# Altium PCB SENSOR.PcbDoc
Units mil, origin at the board's own origin, x right, y up, seen from the top; angles counter-clockwise.
Board outline 2510 x 1960 mil, 2 copper layers (Top Layer, Bottom Layer); 45 components, 28 nets, 139 pads, 57 vias.
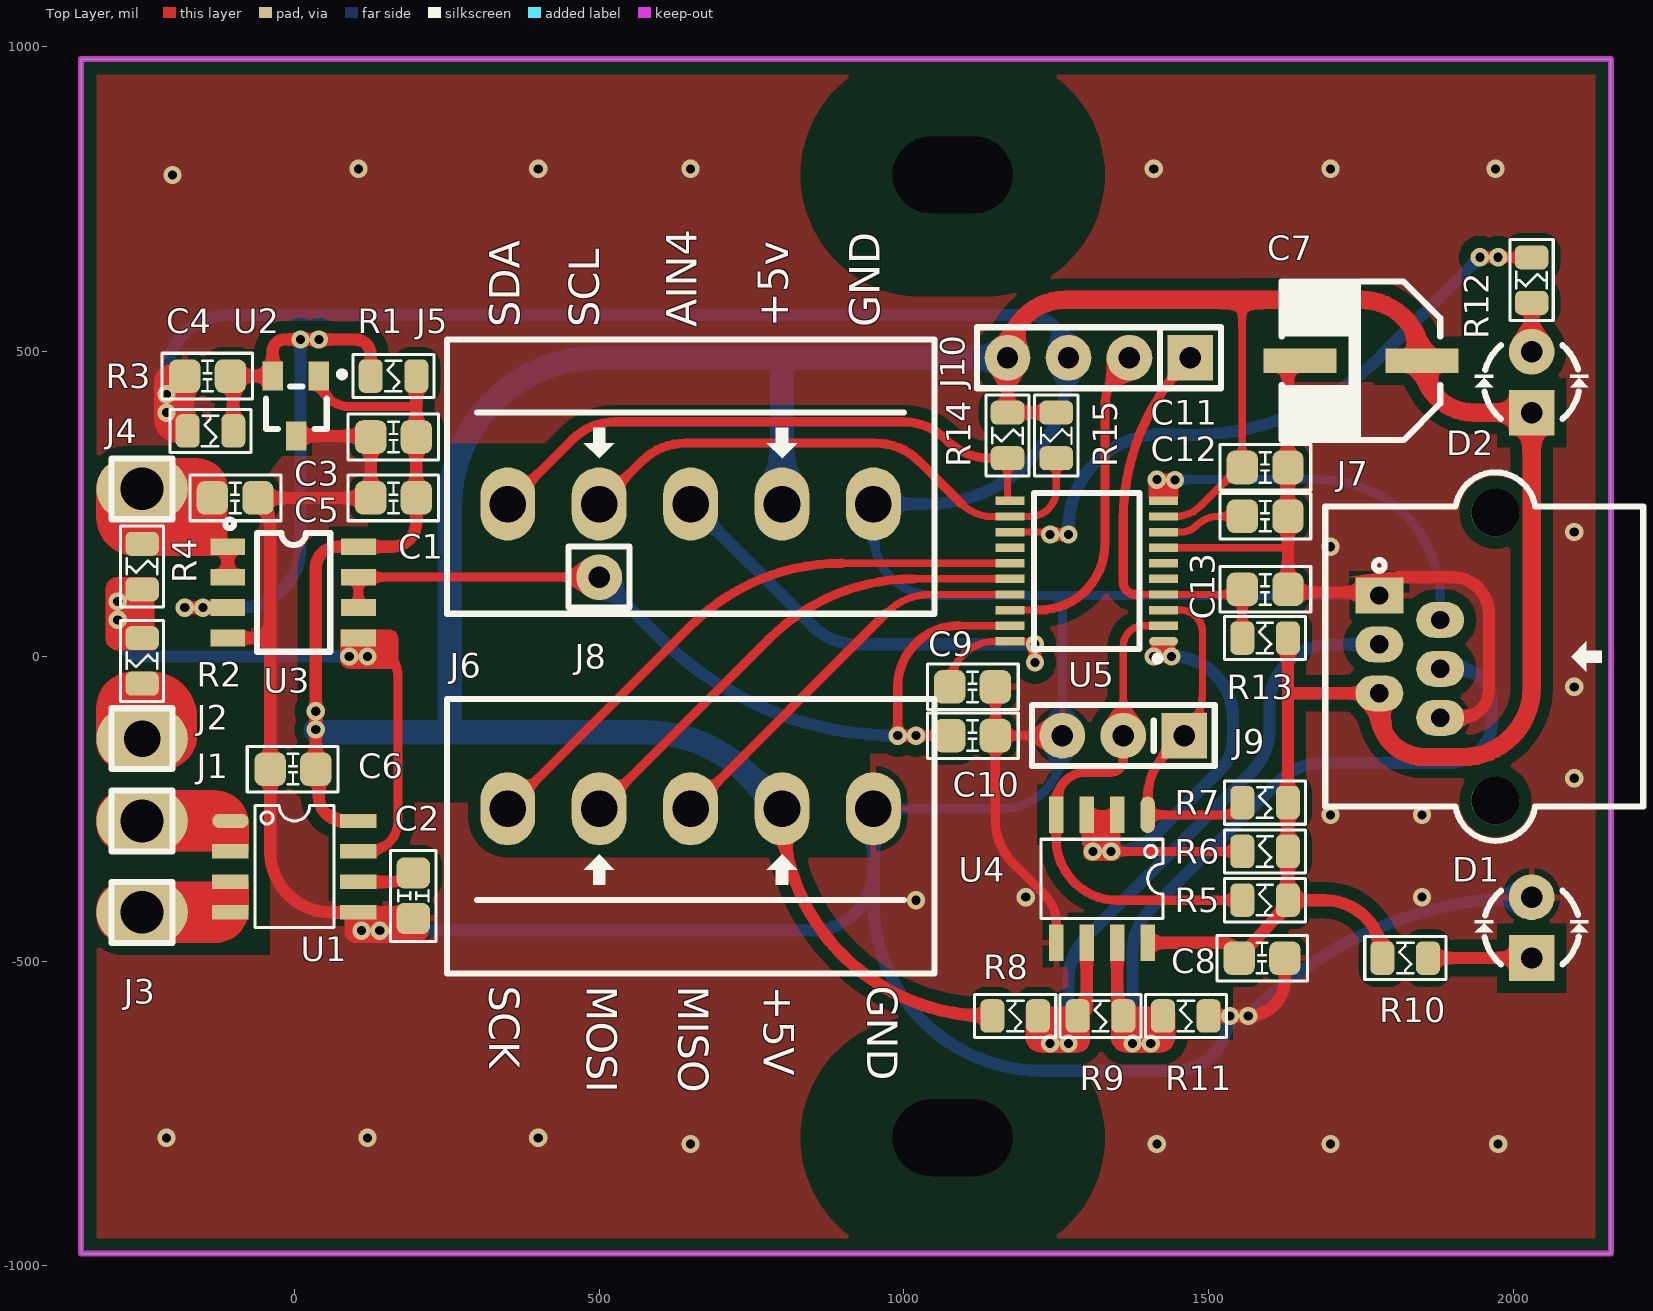
[diagram p0: Top Layer view]
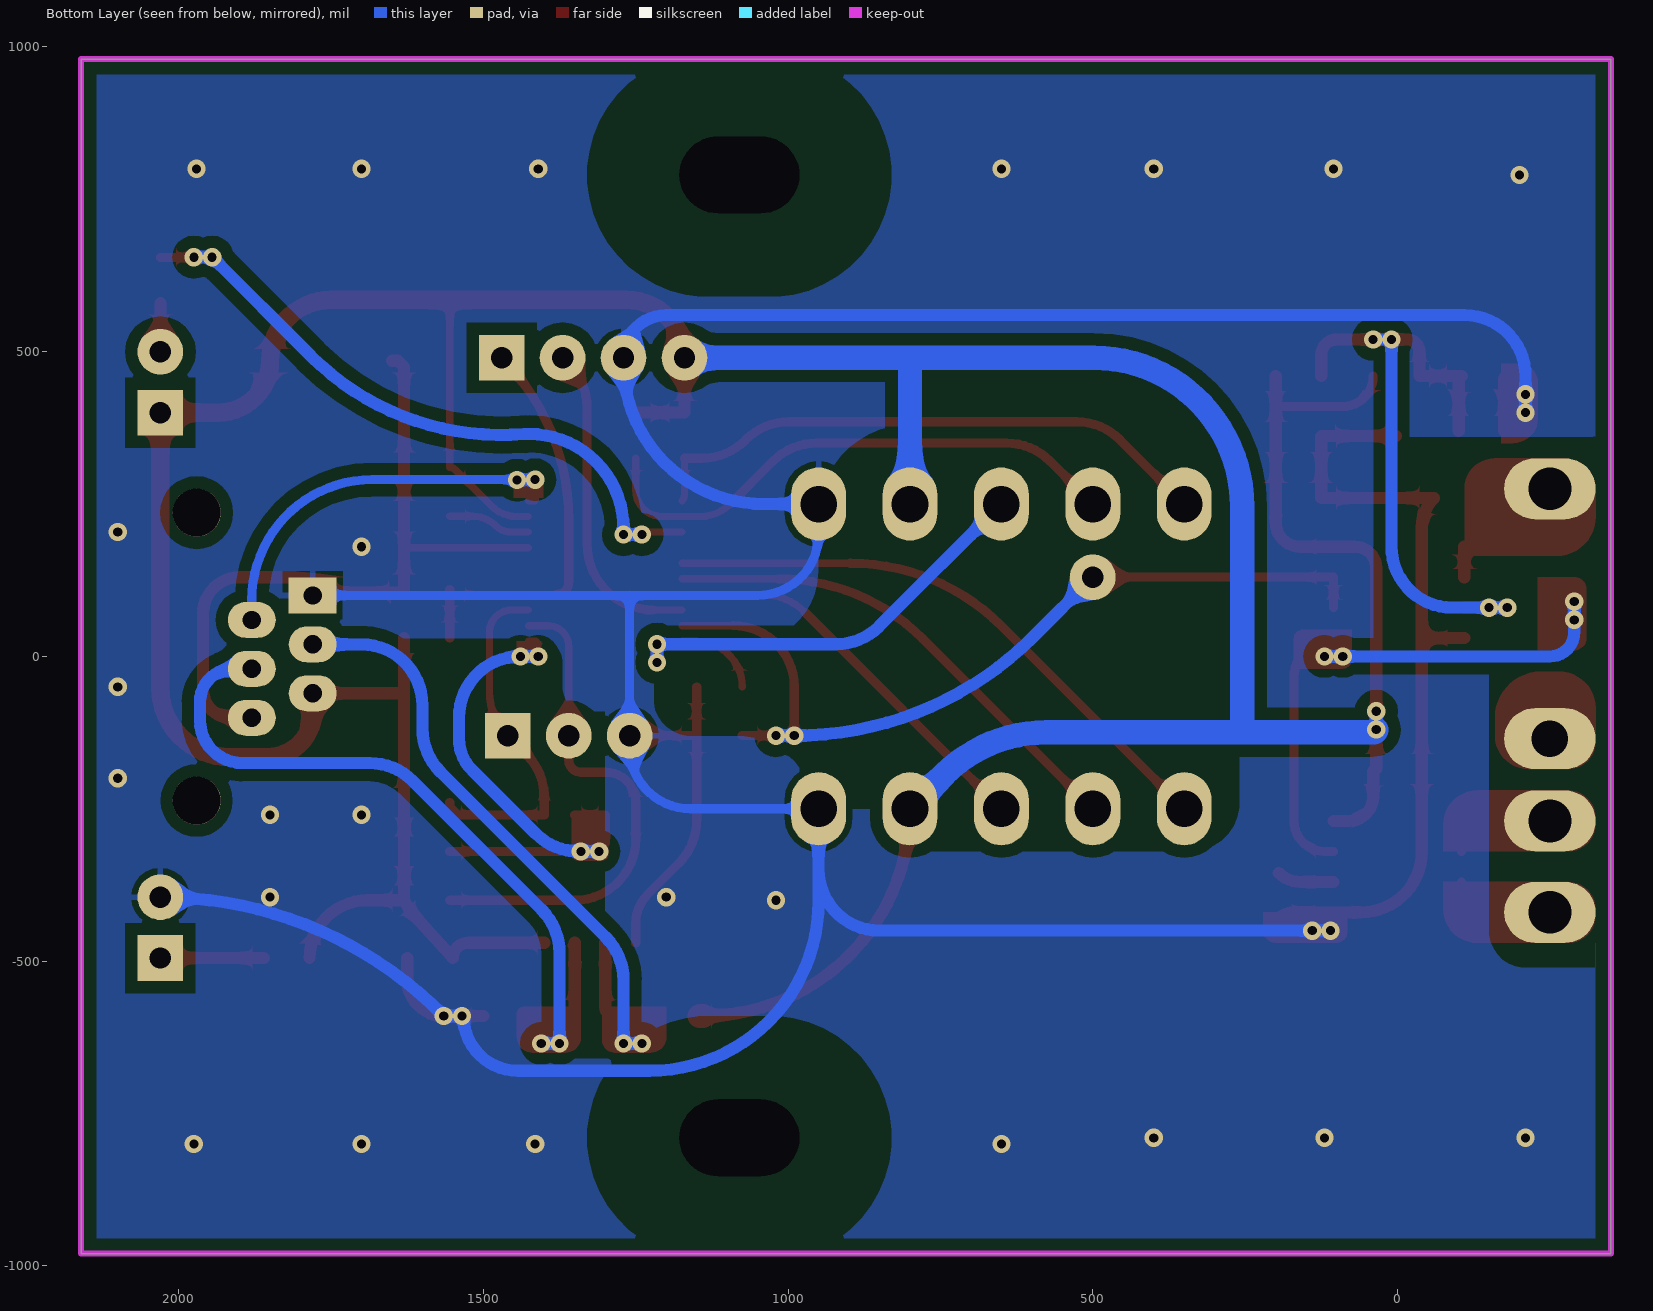
[diagram p1: Bottom Layer view, seen from below]

## Layer stack, top to bottom
Top Solder: solder mask 0.4, Solder Resist, Dk 3.5
Top Layer: signal copper 1.4
Dielectric 1: dielectric 12.6, FR-4, Dk 4.8
Bottom Layer: signal copper 1.4
Bottom Solder: solder mask 0.4, Solder Resist, Dk 3.5

## Board outline
-350,-980 2160,-980 2160,980 -350,980

## Design rules (kind name [scope] priority, off if disabled: settings)
Clearance [All] p1: gap=20 ignorepadtopadclearanceinfootprint=TRUE
PlaneConnect [All] p1: pad.planeconnectstyle=Relief pad.reliefexpansion=20 pad.reliefentries=4 pad.reliefconductorwidth=10 pad.reliefairgap=10 via.planeconnectstyle=Direct via.reliefexpansion=20 via.reliefentries=4 via.reliefconductorwidth=10 via.reliefairgap=10
PolygonConnect [All] p1: thpad.connectstyle=Relief thpad.reliefconductorwidth=10 thpad.reliefentries=4 thpad.polygonreliefangle="90 Angle" thpad.airgapwidth=10 smdpad.connectstyle=Relief smdpad.reliefconductorwidth=10 smdpad.reliefentries=4 smdpad.polygonreliefangle="90 Angle" smdpad.airgapwidth=10 via.connectstyle=Direct via.reliefconductorwidth=10 via.reliefentries=4 via.polygonreliefangle="90 Angle" via.airgapwidth=10
RoutingVias [All] p1: holewidth=15 width=30 viastyle="Through Hole" minholewidth=12 minwidth=24 maxholewidth=28 maxwidth=50
SolderMaskExpansion [All] p1: expansion=4
Width [All] p1: maxlimit=50 minlimit=10 preferedwidth=20
29 further rules are at their usual default settings.

## Classes and differential pairs
component class SENSOR: C8 C9 C10 C11 C12 C13 D1 D2 J7 J8 J9 J10 R6 R8 R10 R11 R12 R13 R14 R15 U3 U4 U5

## Components (designator, comment, footprint, x,y, rotation, side; value= is the part's Value field where it differs from the comment)
C1 "104" CAP-0805 125.2,260 r0 top value=103
C2 "1nF" CAP-0805 195,-430 r90 top value=103
C3 "0.1uF" CAP-0805 125.2,360 r0 top value=103
C4 "1uF" CAP-0805 -180,460 r0 top value=103
C5 "1uF" CAP-0805 -60,260 r180 top value=103
C6 "104" CAP-0805 -39.8,-185 r0 top value=103
C7 "100uF/16V" CAP_AL_6.3x5.5 1750,485 r0 top
C8 "104" CAP-0805 1625,-495 r180 top value=103
C9 "104" CAP-0805 1150,-50 r180 top value=103
C10 "104" CAP-0805 1150,-130 r180 top value=103
C11 "104" CAP-0805 1630,310 r180 top value=103
C12 "104" CAP-0805 1630,230 r180 top value=103
C13 "104" CAP-0805 1630,110 r180 top value=103
D1 "LED-RED" LED-3-R 2030,-445 r90 top
D2 "LED-GRE" LED-3-G 2030,450 r90 top
J1 "Jump_1" JUMP_1#1 -250,-270 r0 top
J2 "Jump_1" JUMP_1#2 -250,-135 r0 top
J3 "Jump_1" JUMP_1#1 -250,-420 r0 top
J4 "Jump_1" JUMP_1#1 -250,275 r0 top
J5 "I2C" "CON2 15EDG3.81-5P" 650,250 r180 top
J6 "SPI" "CON2 15EDG3.81-5P" 650,-250 r0 top
J7 "RJ11-6P6C" RJ12-6P6C 1780,-0.35 r270 top
J8 "Jump_1" JUMP_1#3 500,130 r0 top
J9 "UART" JUMP_3 1460,-130 r270 top
J10 "PRG" Jump_4 1470,490 r270 top
R1 "10K" RES-0805 125.2,460 r0 top value=1K
R2 "20K" RES-0805 -250,30 r270 top value=1K
R3 "10K" RES-0805 -175.2,370 r0 top value=1K
R4 "10K" RES-0805 -250,184.8 r270 top value=1K
R5 "10K" RES-0805 1555.2,-400 r0 top value=1K
R6 "10K" RES-0805 1555.2,-320 r0 top value=1K
R7 "10K" RES-0805 1555.2,-240 r0 top value=1K
R8 "10K" RES-0805 1220,-590 r180 top value=1K
R9 "NC/120R" RES-0805 1360,-590 r180 top value=1K
R10 "10K" RES-0805 1860,-495 r180 top value=1K
R11 "10K" RES-0805 1500,-590 r180 top value=1K
R12 "10K" RES-0805 2030,654.8 r270 top value=1K
R13 "10K" RES-0805 1555.2,30 r0 top value=1K
R14 "10K" RES-0805 1170,325.2 r90 top value=1K
R15 "10K" RES-0805 1250,325.2 r90 top value=1K
U1 "ACS712" SOP08 -105,-270 r0 top
U2 "MCP1525" "SOT_23 - 132" 3,362.81 r180 top
U3 "LM358" SOIC-8 -111.18,182.56 r0 top
U4 "MAX485" SOP08 1400,-260 r270 top
U5 "STM8S003F3P6" TSSOP20 1300,140 r180 top

## Footprints (in the part's own frame and the unit in brackets; to place one, negate y for a bottom-side part, rotate by r counter-clockwise, add the part's x,y. Pads: shape width x height; smd on the part's side, far side on the other; paste and mask are expansions set on the pad)
CAP-0805 [mm] "Chip Cap; Body 2 x 1.2 mm (LxW typ)"
  rrect50% 1.3x1.4 smd: 1(0,0) 2(1.9,0)
  silkscreen extent -0.95,-0.95 2.83,0.95, body extent -0.05,-0.62 1.95,0.62, height 0.8
CAP_AL_6.3x5.5 [mil]
  rect 120x40 smd: 1(100,0) 2(-100,0)
  silkscreen extent -130,-130 130,130, body extent -144,-130 144,130, height 237
"CON2 15EDG3.81-5P" [mil] "CON2 15EDG3.81-5P"
  oval 90x120 hole 60: 1(-300,0) 2(-150,0) 3(0,0) 4(150,0) 5(300,0)
  silkscreen extent -400,-270 400,180, body extent -391,-264 391,170, height 722
JUMP_1#1 [mil] "Jump_1"
  oval 150x100 hole 70: 1(0,0)
  silkscreen extent -50,-50 50,50, body extent -53,-53 53,53, height 346
JUMP_1#2 [mil] "Jump_1"
  oval 150x100 hole 60: 1(0,0)
  silkscreen extent -50,-50 50,50, body extent -53,-53 53,53, height 346
JUMP_1#3 [mil] "Jump_1"
  round 75 hole 35: 1(0,0)
  silkscreen extent -50,-50 50,50, body extent -53,-53 53,53, height 346
JUMP_3 [mil] "Jump_3 Pin 2.54"
  rect 75x75 hole 35: 1(0,0)
  round 75 hole 35: 2(0,-100) 3(0,-200)
  silkscreen extent -50,-250 50,50, body extent -53,-253 53,53, height 346
Jump_4 [mil] "Jump_4 Pin 2.54"
  rect 75x75 hole 35: 1(0,0)
  round 75 hole 35: 2(0,-100) 3(0,-200) 4(0,-300)
  silkscreen extent -50,-350 50,50, body extent -53,-353 53,53, height 346
LED-3-G [mil] "LED 2 PIN, 3mm , Only colour,pin to pin 100mil"
  rect 75x75 hole 35: 1(-50,0)
  round 75 hole 35: 2(50,0)
  silkscreen extent -60,-93 60,93, body extent -66,-65 64,65, height 217
LED-3-R [mil] "LED 2 PIN, 3mm , Only colour,pin to pin 100mil"
  rect 75x75 hole 35: 1(-50,0)
  round 75 hole 35: 2(50,0)
  silkscreen extent -60,-93 60,93, body extent -66,-65 64,65, height 217
RES-0805 [mm] "Chip Resistor; Body 2 x 1.2 mm (LxW typ)"
  rrect50% 1x1.397 smd: 1(0,0) 2(1.9,0)
  silkscreen extent -0.74,-0.9 2.64,0.9, body extent -0.05,-0.62 1.95,0.63, height 0.8
RJ12-6P6C [mm] "https://world.taobao.com/item/45146088619.htm?fromSite=main&spm=a1z10.3-c.w4002-6949907793.9.3ff19e11V2X4CM"
  rect 1.5x2 hole 0.762: 1(-2.55,0)
  oval 1.5x2 hole 0.762: 2(-1.53,2.54) 3(-0.51,0) 4(0.51,2.54) 5(1.53,0) 6(2.55,2.54)
  round 2 hole 2 unplated: 7(-6,4.84) 8(6,4.84)
  silkscreen extent -7.68,-2.25 7.68,11, body extent -7.2,-2.16 7.2,10.84, height 14.5
SOIC-8 [mm]
  rect 1.45x0.7 smd: 1(0.041,-0.065) 2(0.041,-1.335) 3(0.041,-2.605) 4(0.041,-3.875) 5(5.491,-3.875) 6(5.491,-2.605) 7(5.491,-1.335) 8(5.491,-0.065)
  silkscreen extent -0.05,-4.44 4.32,1.07, body extent -0.23,-4.47 5.77,0.53, height 1.7
SOP08 [mm]
  oval 1.52x0.6 smd: 1(0,0)
  rect 1.52x0.6 smd: 2(0,-1.27) 3(0,-2.54) 4(0,-3.81) 5(5.334,-3.81) 6(5.334,-2.54) 7(5.334,-1.27) 8(5.334,0)
  silkscreen extent 1.02,-4.44 4.32,0.64, body extent -0.33,-4.39 5.67,0.51, height 1.7
"SOT_23 - 132" [mm] "SOT 23 _ 1-3-2_TO236"
  rect 0.85x1.2 smd: 1(-0.94,-2.469) 2(0.985,-2.474) 3(0.005,0.026)
  silkscreen extent -2.03,-2.66 1.27,-0.25, body extent -1.47,-2.55 1.53,-0.05, height 1.06
TSSOP20 [mm] "TSOP, 20-Leads, Body 6.5x4.4mm, Pitch 0.65mm, IPC Medium Density"
  oval 1.2x0.35 smd: 1(-3.2,2.925)
  rect 1.2x0.35 smd: 2(-3.2,2.275) 3(-3.2,1.625) 4(-3.2,0.975) 5(-3.2,0.325) 6(-3.2,-0.325) 7(-3.2,-0.975) 8(-3.2,-1.625) 9(-3.2,-2.275) 10(-3.2,-2.925) 11(3.2,-2.925) 12(3.2,-2.275) 13(3.2,-1.625) 14(3.2,-0.975) 15(3.2,-0.325) 16(3.2,0.325) 17(3.2,0.975) 18(3.2,1.625) 19(3.2,2.275) 20(3.2,2.925)
  silkscreen extent -3.08,-3.25 2.2,3.77, body extent -3.27,-3.3 3.28,3.3, height 1.2

## Part data
C1 C2 C3 C4 C5 C6 C8 C9 C10 C11 C12 C13: library part CAP, "Cap SMD"
C7: library part CAP_AL, "Cap AL SMD"
D1 D2: library part LED-DIP, "Led"
J5 J6: library part Jump_5, "Jump_5 Pin 2.54"
J7: "RJ11-6P6C Connecter"
J9: library part Jump_3, "Jump_3 Pin 2.54"
J10: library part Jump_4, "Jump_4 Pin 2.54"
R1 R2 R3 R4 R5 R6 R7 R8 R9 R10 R11 R12 R13 R14 R15: library part RES, "Resistor SMD"
U1: "Fully Integrated, Hall Effect-Based Linear Current Sensor with 2.1 kVRMS Voltage Isolation and a Low-Resistance Current Conductor"
U2: "Vref"
U3: "https://www.ti.com/lit/ds/symlink/lm158-n.pdf"
U4: "RS485-Transceivers"
U5: "ARM"

## Free pads (board coordinates)
  rrect50% 0x0 hole 125.98 slot 196.85 at 0 deg: 9(1080,-790) 9(1080,790)

## Via types
v1: diameter 30, hole 15, Top Layer to Bottom Layer, tented both sides, 56 vias
v2: diameter 30, hole 15, Top Layer to Bottom Layer, 1 vias

## Nets (pads, with @x,y where several pads share a name; then routed paths per layer and width w, separated by ;. In a path a pad name is that pad's centre, name@x,y a point inside that pad or via, vN(x,y) a via of type N, cw(c..) or ccw(c..) an arc to the next point about the centre after c; other vN are vias at no path point)
485-_DE: R6.1 U4.2 U4.3 U5.1 | length 911.6
  Top Layer w12: v1(1410,0) 1413.44,3.44 1413.44,24.02 1414.27,24.84 U5.1
  Top Layer w15: v1(1310,-320) 1310,-315.94 1300,-305.94 U4.3 U4.2 ; v1(1340,-320) R6.1
  Bottom Layer w20: v1(1310,-320) v1(1340,-320) 1343.58,-320 ccw(c1343.58,-220) 1414.29,-290.71 1518.79,-186.21 ccw(c1467.57,-135) 1540,-135 1540,-100 ccw(c1440,-100) 1440,0 v1(1439.02,0) ; v1(1410,0) v1(1439.02,0) ; v1@1442.63,-3.62 v1(1439.02,0)
485-A: J7.3 R8.1 R9.2 U4.6 | length 1143.5
  Top Layer w20: R8.1 R9.2 ccw(c1285.2,-575.2) 1300,-575.2 U4.6
  Bottom Layer w15: J7.3@1771.15,19.72 J7.3
  Bottom Layer w20: v1(1240,-635) v1(1270,-635) 1270,-531.42 cw(c1370,-531.42) 1299.29,-460.71 1570.71,-189.29 ccw(c1500,-118.58) 1600,-118.58 1600,-80.28 cw(c1700,-80.28) 1700,19.72 J7.3@1771.15,19.72
485-B: J7.4 R9.1 R11.2 U4.7 | length 1297
  Top Layer w15: U4.7 U4.7@1354.31,-474.31
  Top Layer w20: U4.7 1350,-580 ccw(c1360,-580) R9.1 R11.2
  Bottom Layer w20: v1(1405,-635) v1(1375,-635) 1375,-486.42 cw(c1475,-486.42) 1404.29,-415.71 1615.71,-204.29 cw(c1686.42,-275) 1686.42,-175 1895,-175 ccw(c1895,-105) 1965,-105 1965,-75 ccw(c1910,-75) 1910,-20 1880,-20 J7.4
+2.5V: C4.2 R1.1 R3.2 U2.2 U3.3 | length 1111.2
  Top Layer w20: v1(-180,80) v1(-150,80) U3.3 ; R3.2 -100.39,455.2 ccw(c-105.2,455.2) C4.2 -35.8,460 U2.2 -35.8,500 cw(c-15.8,500) -15.8,520 v1(10,520) v1(40,520) 100,520 cw(c100,494.8) 125.2,494.8 R1.1
  Bottom Layer w20: v1(-180,80) v1(-150,80) -90,80 ccw(c-90,180) 10,180 v1(10,520) v1(40,520)
+5V: C1.2 C3.2 C6.2 C7.1 C8.2 C11.2 D2.1 J5.2 J6.4 J7.5 J10.4 R1.2 R5.2 R6.2 R7.2 R8.2 R10.2 R13.2 R14.2 R15.2 U1.8 U2.1 U3.8 U4.8 U5.9 | length 7705
  Top Layer w12: U5.9 1444.74,229.57 ccw(c1444.81,289.33) 1487.11,247.11 1546.33,306.33 cw(c1555.2,297.45) C11.2@1555,310 ; 1555,585 C11.2@1555,310 ; C11.2@1555,310 cw(c1555.2,297.45) C11.2 C11.2@1555,310
  Top Layer w15: U2.1 ccw(c90,460) 90,410 200,410 ; J10.4 J10.4@1170,500
  Top Layer w20: U1.8 80,-270 cw(c80,-230) 40,-230 40,-190 ccw(c35,-190) C6.2 v1(35,-120) v1(35,-90) 35,145 cw(c70,145) 70,180 U3.8 160,180 ccw(c160,220) 200,220 C1.2 C3.2 200,410 R1.2 ; J6.4 ccw(c1140,-250) R8.2@1140,-590 ; J10.4 R14.2 R15.2 ; U4.8 1525.2,-470 cw(c1525.2,-495) C8.2 1562.99,-480.24 1620.31,-417.5 R5.2 ; R13.2 1630,-65 ; J7.5@1779.41,-87.23 1779.42,-87.02 J7.5 1640.65,-60.59 ccw(c1640.65,-75.65) 1630,-65 ; R10.2 ccw(c1690.2,-495) 1690.2,-400 R5.2 ; R5.2 R6.2 R7.2 1630,-65
  Top Layer w30: J10.4 cw(c1265,490) 1265,585 1555,585 1750,585 cw(c1750,485) C7.1 ccw(c1935,485) 1935,400 D2.1 2030,-51.98 cw(c1916.98,-51.98) 1916.98,-165 1853.92,-165 cw(c1853.83,-90.51) J7.5@1779.41,-87.23
  Top Layer w40: R8.2@1140,-590 R8.2
  Bottom Layer w15: J10.4@1165.15,490 J10.4
  Bottom Layer w20: v1(35,-120) v1(35,-90)
  Bottom Layer w40: v1(35,-120) ccw(c39.57,-120) 39.57,-124.57 260,-124.57 ; J6.4 744.01,-194.01 ccw(c576.51,-361.3) 576.57,-124.57 260,-124.57 ; J5.2 800,485 cw(c805,485) 805,490 ; J10.4@1165.15,490 805,490 ; 260,-124.57 cw(c260,-119.57) 255,-119.57 255,196.95 255,197.04 255,246.42 cw(c498.58,246.42) 498.58,490 805,490
AIN3: C10.2 J8.1 U3.6 U3.7 U5.19 | length 1455.5
  Top Layer w12: 1090,50.43 U5.19
  Top Layer w15: U3.6 U3.7 J8.1 ; C10.2 v1(1020,-130) v1(990,-130) 990,-49.57 cw(c1090,-49.57) 1090,50.43
  Bottom Layer w20: J8.1 597.28,32.72 597.35,32.65 ccw(c990,425.27) v1(990,-130) v1(1020,-130)
AIN4: C9.2 J5.3 U5.20 | length 900.5
  Top Layer w12: C9.2 cw(c1150.04,-50) 1150.04,24.84 U5.20 1174.91,23.95 1206.18,23.95 1210.13,20 v1(1215,20)
  Top Layer w20: v1(1215,-10) v1(1215,20)
  Bottom Layer w20: J5.3 850.71,49.29 ccw(c921.42,120) 921.42,20 v1(1215,20) v1(1215,-10)
GND: C1.1 C2.1 C3.1 C4.1 C5.1 C6.1 C7.2 C8.1 C9.1 C10.1 C11.1 C12.1 C13.1 D1.2 J5.1 J6.5 J7.1 J7.6 J9.3 J10.3 R3.1 R11.1 U1.5 U2.3 U3.4 U4.5 U5.7 | length 9600
  Top Layer w12: U5.7 1628.39,178.39 1630,180
  Top Layer w15: C9.1 C10.1 ; U4.5 1250,-438.28 ccw(c1181.72,-438.28) 1230,-390 1179.29,-339.29 cw(c1250,-268.58) 1150,-268.58 C10.1 ; J9.3 C10.1
  Top Layer w20: v1(-210,400) v1(-210,430) -209.02,430 -180,459.02 C4.1 cw(c-180,455.2) -175.2,455.2 R3.1 ; U3.4 -39.8,30 ; U2.3 123.41,361.79 cw(c123.41,360) C3.1 C1.1 C5.1 cw(c-108.76,211.24) -39.8,211.24 -39.8,30 ; v1(140,-450) v1(110,-450) cw(c110,-445) 105,-445 U1.5 ; C2.1 ccw(c170.86,-454.14) 170.86,-420 U1.5 ; R11.1 v1(1535,-590) v1(1565,-590) ccw(c1565,-530) 1625,-530 C8.1 ; C7.2 1640,485 1630,475 C11.1 C12.1 1630,180 C13.1 1634.98,105.02 1775.02,105.02 J7.1 cw(c1809.96,100.04) 1809.96,130 1900,130 cw(c1900,70) 1960,70 1960,-55 cw(c1914.25,-55) 1914.25,-100.75 J7.6 ; -39.8,30 C6.1 -39.8,-320 ccw(c60.2,-320) 60.2,-420 U1.5
  Bottom Layer w15: J6.5 1160,-250 ccw(c1160,-150) 1260,-150 J9.3 1260,100.04 ; J5.1 950,200.04 ccw(c1050,200.04) 1050,100.04 1260,100.04 ; J7.1 1260,100.04
  Bottom Layer w20: v1(-210,400) v1(-210,430) -210,460 cw(c-110,460) -110,560 1200,560 cw(c1200,490) J10.3 1270,480.52 cw(c1039.48,480.52) 1039.48,250 J5.1 ; v1(110,-450) v1(140,-450) 850,-450 ccw(c850,-350) 950,-350 ; J6.5 950,-350 ; D1.2 D1.2 ccw(c2030,-1046.84) 1569.03,-585.97 v1(1565,-590) v1(1535,-590) 1532.79,-590 cw(c1442.79,-590) 1442.79,-680 1227.72,-680 cw(c1227.72,-402.28) 950,-402.28 950,-350
  other v1: 650,-800 1415,-800 1700,-800 1975,-800 -210,-790 120,-790 400,-790 1020,-400 1200,-395 1850,-395 1700,-260 1850,-260 2100,-200 2100,-50 2100,203.98 -200,790 105,800 400,800 650,800 1410,800 1700,800 1970.55,800
  other v2: 1700,180
LED: R12.1 U5.13 | length 1117.7
  Top Layer w12: U5.13 1230.4,203.98 cw(c1230.4,190.4) v1(1240,200)
  Top Layer w15: v1(1945,655) 1945,654.8 R12.1
  Top Layer w20: v1(1240,200) v1(1270,200)
  Bottom Layer w20: v1(1240,200) v1(1270,200) 1270,210.37 cw(c1424.63,210.37) 1424.63,365 1431.25,365 cw(c1431.25,345) 1432.87,364.93 ccw(c1470.21,805.5) 1783.04,493.04 v1(1945,655) v1(1975,655)
MISO: J6.3 U5.17 | length 695.4
  Top Layer w12: 972.33,72.33 cw(c1043.04,1.61) 1043.04,101.61 U5.17
  Top Layer w15: J6.3@650,-220 J6.3 972.33,72.33
MOSI: J6.2 U5.16 | length 815.8
  Top Layer w12: 1016.03,127.2 U5.16
  Top Layer w15: J6.2 779.04,29.04 cw(c1016.03,-207.96) 1016.03,127.2
NetC2_2: C2.2 U1.6 | length 94
  Top Layer w20: U1.6 159.26,-370 ccw(c159.26,-319.46) C2.2
NetC12_2: C12.2 U5.8 | length 136.2
  Top Layer w12: U5.8 1454.24,203.98 ccw(c1454.24,240.69) 1480.21,214.73 cw(c1517.07,177.87) 1517.07,230 C12.2
NetD1_1: D1.1 R10.1 | length 170
  Top Layer w20: R10.1 D1.1
NetD2_2: D2.2 R12.2 | length 80
  Top Layer w20: D2.2 R12.2
NetJ1_1: J1.1 U1.1 U1.2 | length 195
  Top Layer w15: J1.1 U1.1 U1.2
NetJ2_1: J2.1 R2.2 | length 90.2
  Top Layer w20: J2.1 R2.2
NetJ3_1: J3.1 U1.3 U1.4 | length 195
  Top Layer w15: J3.1 U1.4 U1.3
NRST: C13.2 J10.1 R13.1 U5.4 | length 689.2
  Top Layer w12: 1380,101.61 U5.4 1546.81,101.61 ccw(c1546.81,110) C13.2
  Top Layer w15: 1380,101.61 cw(c1380,121.61) 1360,121.61 1360,224.36 1360,224.41 cw(c1735.56,224.44) 1442.92,459.83 1442.92,460 J10.1 ; R13.1 C13.2
PA3: J7.2 U5.10 | length 685.8
  Top Layer w12: U5.10 1415.89,255.16 1415,256.05 v1(1415,290) 1415.34,289.66 1444.48,289.66 v1(1444.81,289.33)
  Bottom Layer w15: v1@1444.81,290 1682.69,290 cw(c1682.69,92.69) 1880,92.69 J7.2
  Bottom Layer w20: v1(1415,290) v1@1444.81,290
RXD: J9.1 R7.1 U4.1 U5.3 | length 579.6
  Top Layer w12: U5.3 1453.98,76.02 cw(c1453.98,40) 1490,40 1490,-58.58 cw(c1390,-58.58) J9.1@1460.71,-129.29
  Top Layer w15: J9.1 1429.29,-160.71 ccw(c1500,-231.42) 1400,-231.42 U4.1 1541.74,-260 1555.2,-246.55 R7.1
SCK: J6.1 U5.15 | length 975.8
  Top Layer w12: 897.46,152.8 U5.15
  Top Layer w15: J6.1 650.45,50.45 cw(c897.46,-196.45) 897.46,152.8
SCL: J5.4 R15.1 U5.12 | length 906.7
  Top Layer w12: 1095,250 ccw(c1144.33,299.33) 1144.33,229.57 U5.12 1206.61,229.57 ccw(c1206.61,272.95) 1250,272.95 R15.1
  Top Layer w15: J5.4 570.71,320.71 cw(c641.42,250) 641.42,350 953.58,350 cw(c953.58,250) 1024.29,320.71 1095,250
SDA: J5.5 R14.1 U5.11 | length 958.9
  Top Layer w12: R14.1 1170,264.85 ccw(c1183.71,264.85) U5.11
  Top Layer w15: J5.5 455.71,355.71 cw(c526.42,285) 526.42,385 998.58,385 cw(c998.58,285) 1069.29,355.71 1070.51,354.49 ccw(c1141.22,425.2) 1141.22,325.2 R14.1
SWIM: J10.2 U5.18 | length 535.5
  Top Layer w12: U5.18 1221.2,76.02
  Top Layer w15: 1221.2,76.02 ccw(c1221.2,184.82) 1330,184.82 1330,330.76 1330,330.81 1330,408.58 cw(c1430,408.58) 1359.29,479.29 J10.2
TXD: J9.2 R5.1 U4.4 U5.2 | length 844.5
  Top Layer w12: J9.2 1360,16.72 cw(c1393.72,16.72) 1393.72,50.43 U5.2
  Top Layer w15: J9.2 1360,-170 cw(c1340,-170) 1340,-190 1299.19,-190 ccw(c1299.19,-239.19) 1250,-239.19 U4.4 1250,-300 ccw(c1350,-300) 1350,-400 R5.1
VOL: R2.1 R4.2 U1.7 U3.5 | length 1112.4
  Top Layer w15: R2.1 R4.2 ; v1(90,0) 90,15 cw(c105,15) U3.5 cw(c105,-35) 170,-35 170,-270 cw(c120,-270) 120,-320 U1.7
  Top Layer w20: v1(-290,90) v1(-290,60) -267.5,39.69 R2.1
  Bottom Layer w20: v1(-290,90) v1(-290,60) -290,40 ccw(c-250,40) -250,0 v1(90,0) v1(120,0)
Vref: C5.2 J4.1 R4.1 U3.1 U3.2 | length 407.1
  Top Layer w20: C5.2 ccw(c-149.8,260) -149.8,275 J4.1 R4.1 ccw(c-245.2,184.8) -245.2,180 U3.1 U3.2
pads on no net: J7.7 J7.8 U5.5 U5.6 U5.14

## Polygon pours and split planes (outlines as drawn)
GND on Bottom Layer "Top Layer-No Net" (solid, remove dead copper, pour order 2): 2160,980 -350,980 -350,-980 2160,-980
GND on Top Layer "Top Layer-No Net" (solid, remove dead copper, pour order 0): -350,-980 -350,980 2160,980 2160,-980

## Keep-outs
Keep-Out Layer:
  the board outline again, w10

## Other copper
Top Layer:
  pour cut-out: -210,29.94 -210,-490 -39.8,-490 -39.8,30.06
  pour cut-out: 1450,-630 1540,-630 1540,-495 1370,-495 1370,-560 1450,-560
  pour cut-out: 1630,460 1630,110 1460,110 1460,460
  pour cut-out: 1914.29,440 1914.29,630 2010,630 2010,420 1910,420
  pour cut-out: 1580,560 1580,450 1800,450 1800,560
  pour cut-out: 200,201.48 200,350 460,350 1115.67,350 1115.67,-160 945,-160 945,-330.31 350,-330.31 350,-240 133.42,-240 133.42,130
  pour cut-out: -100.39,450 120,450 120,361.79 61.79,361.79 ccw(c61.78,245) -55,245 -55,225 cw(c-80,225) -80,200 -96.02,200 cw(c-96.02,203.98) -100,203.98
  pour cut-out: 120,380 120,220 ccw(c140,220) 140,200 180,200 ccw(c180,220) 200,220 200,380
  region net NetJ2_1: -325,-140 -325,-85 cw(c-265,-85) -265,-25 -235,-25 cw(c-235,-100) -160,-100 -160,-130 cw(c-215,-130) -215,-185 -280,-185 cw(c-280,-140)
  region net NetJ3_1: -280,-470 -130,-470 ccw(c-130,-415) -75,-415 -75,-370 -280,-370 ccw(c-280,-415) -325,-415 -325,-425 ccw(c-280,-425)
  region net NetJ1_1: -280,-220 -130,-220 cw(c-130,-275) -75,-275 -75,-320 -280,-320 cw(c-280,-275) -325,-275 -325,-265 cw(c-280,-265)
  region net 485-_DE: 1405,25 1445,25 1445,-10 1405,-10
  region net PA3: 1402,260 1402,292 cw(c1410,292) 1410,300 1450,300 1450,260
  region net 485-_DE: 1295,-260 1295,-325 ccw(c1305,-325) 1305,-335 1345,-335 ccw(c1345,-325) 1355,-325 1355,-260
  region net 485-A: 1200,-574.97 1200,-625 ccw(c1225,-625) 1225,-650 1285,-650 ccw(c1285,-630) 1305,-630 1305,-575.25
  region net 485-B: 1340,-574.99 1340,-625 ccw(c1365,-625) 1365,-650 1420,-650 ccw(c1420,-625) 1445,-625 1445,-585.01 ccw(c1435.22,-585.01) 1435.25,-575.24
  region net VOL: 75,44 75,-5 ccw(c90,-5) 90,-20 160,-20 ccw(c160,-10) 170,-10 170,30 ccw(c156,30) 156,44
  region net VOL: -230,130 -290,130 ccw(c-290,110) -310,110 -310,30 ccw(c-290,30) -290,10 -230,10
  region net Vref: -110,165 -261,165 cw(c-261,229) -325,229 -325,275 cw(c-275,275) -275,325 -159,325 cw(c-159,276) -110,276
  region net GND: -170,350 -190,350 cw(c-190,390) -230,390 -230,450 cw(c-200,450) -200,480 -170,480
  region net GND: 82.6,-420 82.6,-452.6 ccw(c100,-452.6) 100,-470 200,-470 ccw(c200,-450) 220,-450 220,-420
Bottom Layer:
  pour cut-out: 40,19.72 40,360 -162.99,360 -162.99,19.72
  pour cut-out: -324.51,-511.02 -211.02,-511.02 ccw(c-211.02,-450) -150,-450 -150,360 -320,360
  pour cut-out: 955,-255 955,-250 800,-250 800,-320 340,-320 cw(c340,-240) 260,-240 260,240 cw(c400,240) 400,380 800,380 cw(c800,230) 950,230 950,140 ccw(c1070,140) 1070,20 1220,20 1220,-70 cw(c1160,-70) 1160,-130 1085.1,-130 ccw(c1085.1,-260.2)
  pour cut-out: 1290,-660 1290,-450 1350.04,-450 1350.04,-659.96
  pour cut-out: 1900,30 1900,-170 1420,-170 1420,-420 1300,-420 1300,-90 1330,-90 ccw(c1330,-50) 1370,-50 1370,-10 cw(c1410,-10) 1410,30
Multi-Layer:
  pour cut-out: 1030,590 1130,590 ccw(c1130,790) 1330,790 ccw(c1130,790) 1130,990 1030,990 ccw(c1030,790) 830,790 ccw(c1030,790)
  pour cut-out: 1030,-990 1130,-990 ccw(c1130,-790) 1330,-790 ccw(c1130,-790) 1130,-590 1030,-590 ccw(c1030,-790) 830,-790 ccw(c1030,-790)

## Silkscreen, mask and mechanical layers (free items; w line width, h text height)
Top Overlay:
  lines w10: -2165.35,-984.25 -2165.35,984.25 ; -2136.65,1050.59 -2136.65,2428.54 -365,2428.54
  text "SDA" at 370,540 h50 r90
  text "SCL" at 500,540 h50 r90
  text "AIN4" at 660,540 h50 r90
  text "+5v" at 810,540 h50 r90
  text "GND" at 960,540 h50 r90
  text "SCK" at 320,-540 h50 r270
  text "MOSI" at 480,-540 h50 r270
  text "MISO" at 630,-540 h50 r270
  text "+5V" at 770,-540 h50 r270
  text "GND" at 940,-540 h50 r270